# EAGLE board bottom (EAGLE 6.5.0)
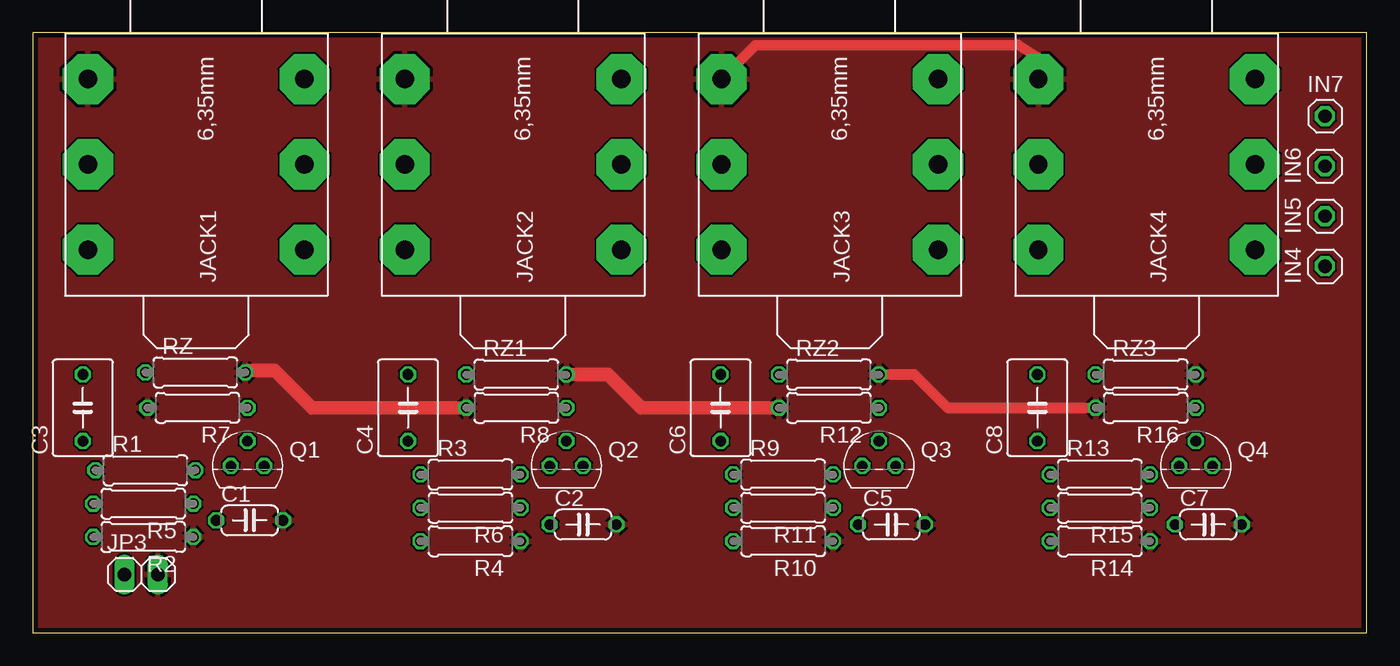
[diagram p0: board, top side]
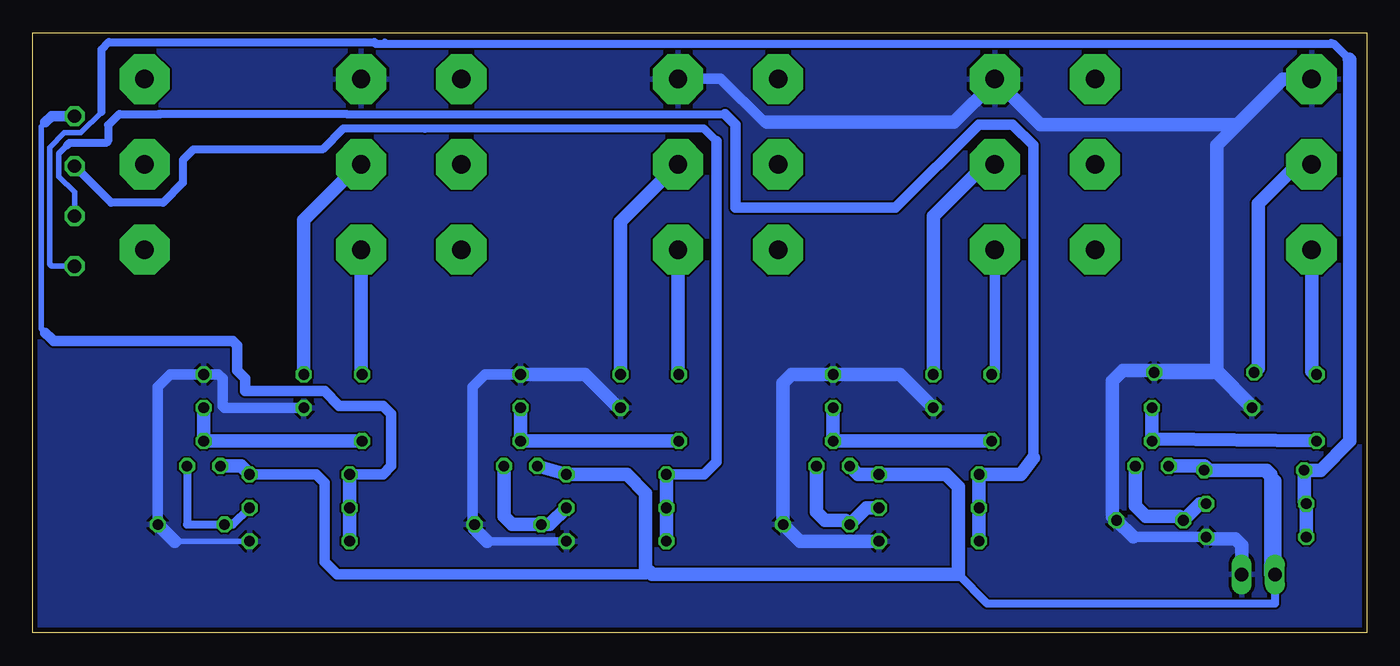
[diagram p1: board, bottom side, seen from below]

Size 101.6 x 45.72 mm. Coordinates in mm from the lower left corner, seen from the top.
Outline: 0,0 101.6,0 101.6,45.72 0,45.72 0,0
Copper layers (1*16): Top 0.0356mm / dielectric 1.5011mm / Bottom 0.0356mm
Design rules "OSHpark": minimum track width 6mil, minimum drill 13mil, track to track 6mil, track to pad 6mil, pad to pad 6mil, via to via 6mil, smd to smd 6mil, copper to edge 15mil, drill to drill 6mil, minimum pad ring 7mil, minimum via ring 7mil, stop-mask expansion 3mil, vias tented up to drill 0mil, thermal gap 10mil

## Footprints (pad centres in the part's own frame; a part is rotated, then mirrored left to right if it is on the bottom)
C050-024X044 = drill 0.813 octagon: 1 -2.54,0; 2 2.54,0
C050-045X075 = drill 0.813 octagon: 1 -2.54,0; 2 2.54,0
1X01 = drill 1.016 octagon: 1 0,0
JACK_STEREO_6.35MM = drill 1.4 pad 3.81 octagon: 2 -6,-8.5; 3 -6,8; 4 0.5,-8.5; 5 0.5,8; 6 7,-8.5; 7 7,8
1X02 = drill 1.016 long: 1 -1.27,0; 2 1.27,0
TO92 = drill 0.813 octagon: 1 1.27,0; 2 0,1.905; 3 -1.27,0
0207/7 = drill 0.813 octagon: 1 -3.81,0; 2 3.81,0

## Placement (x,y rotation side)
C1  82pf  [C050-024X044]  16.51,8.57 0 top
C2  82pf  [C050-024X044]  41.91,8.26 0 top
C3  1uF  [C050-045X075]  3.81,17.15 90 top
C4  1uF  [C050-045X075]  28.57,17.15 90 top
C5  82pf  [C050-024X044]  65.41,8.26 0 top
C6  1uF  [C050-045X075]  52.39,17.15 90 top
C7  82pf  [C050-024X044]  89.53,8.26 0 top
C8  1uF  [C050-045X075]  76.52,17.15 90 top
IN4  [1X01]  98.42,27.94 90 top
IN5  [1X01]  98.42,31.75 90 top
IN6  [1X01]  98.42,35.56 90 top
IN7  [1X01]  98.42,39.37 0 top
JACK1  JACK_STEREO_6.35MM  [JACK_STEREO_6.35MM]  12.7,36.2 270 top
JACK2  JACK_STEREO_6.35MM  [JACK_STEREO_6.35MM]  36.83,36.2 270 top
JACK3  JACK_STEREO_6.35MM  [JACK_STEREO_6.35MM]  60.96,36.2 270 top
JACK4  JACK_STEREO_6.35MM  [JACK_STEREO_6.35MM]  85.09,36.2 270 top
JP3  9v  [1X02]  8.26,4.45 0 top
Q1  J201  [TO92]  16.35,12.7 0 top
Q2  J201  [TO92]  40.64,12.7 0 top
Q3  J201  [TO92]  64.45,12.7 0 top
Q4  J201  [TO92]  88.58,12.7 0 top
R1  2m2  [0207/7]  8.57,12.38 0 top
R2  2m2  [0207/7]  8.41,7.3 180 top
R3  2m2  [0207/7]  33.34,12.07 0 top
R4  2m2  [0207/7]  33.34,6.98 180 top
R5  10k  [0207/7]  8.41,9.84 180 top
R6  10k  [0207/7]  33.34,9.53 180 top
R7  3k  [0207/7]  12.54,17.15 180 top
R8  3k  [0207/7]  36.83,17.15 180 top
R9  2m2  [0207/7]  57.15,12.07 0 top
R10  2m2  [0207/7]  57.15,6.98 180 top
R11  10k  [0207/7]  57.15,9.53 180 top
R12  3k  [0207/7]  60.64,17.15 180 top
R13  2m2  [0207/7]  81.28,12.07 0 top
R14  2m2  [0207/7]  81.28,6.98 180 top
R15  10k  [0207/7]  81.28,9.53 180 top
R16  3k  [0207/7]  84.77,17.15 180 top
RZ  560r  [0207/7]  12.38,19.84 0 top
RZ1  560r  [0207/7]  36.83,19.69 0 top
RZ2  560r  [0207/7]  60.64,19.69 0 top
RZ3  560r  [0207/7]  84.77,19.69 0 top

## Library data of the parts
C1-C8 R1-R16 RZ RZ1-RZ3 = rcl
IN4-IN7 JP3 = pinhead
JACK1-JACK4 = jack_6.35mm_mine
Q1-Q4 = transistor-fet

## Nets
GND: C1.2 C2.2 C5.2 C7.2 JACK1.2 JACK2.2 JACK3.2 JACK4.2 JP3.2 R2.1 R4.1 R7.2 R8.2 R10.1 R12.2 R14.1 R16.2 RZ1.2 RZ2.2 RZ3.2 RZ.2
INPUT1: IN4.1 R1.1 R2.2 R5.2
INPUT2: IN5.1 R3.1 R4.2 R6.2
INPUT3: IN6.1 R9.1 R10.2 R11.2
N$1: JACK4.4 RZ3.1
N$2: C1.1 Q1.1 R5.1
N$3: C3.1 Q1.2 R7.1
N$4: C5.1 Q3.1 R11.1
N$5: C3.2 JACK1.6
N$6: JACK1.4 RZ.1
N$7: C2.1 Q2.1 R6.1
N$8: C4.1 Q2.2 R8.1
N$10: C4.2 JACK2.6
N$11: JACK2.4 RZ1.1
N$12: C8.2 JACK4.6
N$13: C6.1 Q3.2 R12.1
N$14: C6.2 JACK3.6
N$15: JACK3.4 RZ2.1
N$16: C8.1 Q4.2 R16.1
N$17: C7.1 Q4.1 R15.1
N$18: IN7.1 R13.1 R14.2 R15.2
VCC: JP3.1 Q1.3 Q2.3 Q3.3 Q4.3 R1.2 R3.2 R9.2 R13.2

## Tracks (layer width: path | path; a pad name or v marks a point on that pad's centre or on a via)
GND
  Top 0.813: JACK3.2 55.03,44.77 74.61,44.77 75.05,44.81 76.5,43.85 JACK4.2 | R16.2 69.69,17.15 67.15,19.69 RZ2.2
  Top 1.016: R8.2 21.27,17.15 18.41,20 16.35,20 RZ.2 | R12.2 46.35,17.15 43.81,19.69 RZ1.2
  Bottom 0.406: R14.1 90.81,6.98
  Bottom 0.61: 66.99,6.98 R10.1 66.83,6.98 68.1,8.26
  Bottom 0.813: R2.1 17.78,7.3 | 45.67,38.89 45.88,38.89 49.21,42.23 52.43,42.23 JACK3.2 | 68.1,8.26 68.1,18.73 67.15,19.69 RZ2.2 | C7.2 92.08,18.73 91.12,19.69 RZ3.2 87.47,19.69 87.15,19.37 87.15,17.3 87,17.15 R16.2
  Bottom 1.016: JACK1.2 6.38,42.2 9.84,38.73 | 9.84,38.73 24.87,38.73 JACK2.2 28.33,42 31.43,38.89 45.67,38.89 | RZ.2 11.43,19.84 R7.2 8.73,17.3 11.43,20 | 17.78,7.3 C1.2 19.37,8.89 19.37,19.21 18.57,20 11.43,20 | JP3.2 9.53,6.67 10,7.14 12.06,7.14 R2.1 | 11.43,20 11.43,37.15 9.84,38.73 | R8.2 35.56,19.69 RZ1.2 43.81,19.69 44.45,19.05 C2.2 43.18,6.98 R4.1 | R12.2 56.99,17.15 59.53,19.69 RZ2.2 | C5.2 67.94,7.94 66.99,6.98 | 90.81,6.98 C7.2
  pour Bottom: 0,45.72 0,0 101.6,0 101.6,45.72
  pour Top: 0,45.72 0,0 101.6,0 101.6,45.72
INPUT1
  Bottom 0.406: IN4.1 100.17,27.94 100.33,28.1 100.33,36.99 99.22,38.1 97.95,38.1 96.36,39.69 | 74.81,45.09 74.61,44.89
  Bottom 0.61: 2.65,44.89 74.61,44.89 75.45,44.89 75.58,45.01 95.81,45.01 96.36,44.45 96.36,39.69 | 2.5,44.89 1.33,43.71 1.33,43.72 2.49,44.89 2.5,44.89 | 2.5,44.89 2.65,44.89 | 2.7,44.93 2.7,44.94 2.65,44.89
  Bottom 1.016: 1.33,43.71 1.27,43.66 1.27,14.61 3.49,12.38 R1.1 4.76,10 R5.2 R2.2
INPUT2
  Bottom 0.406: 98.98,37.15 99.62,36.51 99.62,34.77 98.42,33.58 IN5.1
  Bottom 0.61: 48.9,39.52 77.71,39.52 77.88,39.54 91.98,39.54 91.84,39.53 95.02,39.53 95.86,38.68 95.86,37.47 96.01,37.31 98.82,37.31 98.98,37.15
  Bottom 0.813: 48.9,39.52 48.08,38.71 48.08,32.39 35.88,32.39 29.53,38.73 26.99,38.73 25.4,37.15 25.4,13.34
  Bottom 1.016: 25.4,13.34 26.35,12.07 R3.1 R6.2 R4.2
INPUT3
  Bottom 0.61: IN6.1 95.65,32.78 91.68,32.78 90.17,34.29 90.17,36.04 89.38,36.83 79.53,36.83 77.95,38.42 71.75,38.42 71.75,38.38 71.72,38.42 50.48,38.42 49.53,37.47
  Bottom 0.813: 49.53,37.47 49.53,13.02 50.48,12.07 R9.1
  Bottom 1.016: R9.1 R11.2 R10.2
N$1
  Bottom 1.016: JACK4.4 76.7,35.7 80.96,31.43 RZ3.1
N$2
  Bottom 1.016: Q1.1 17.62,9.68 16.83,8.89 14.29,8.89 C1.1 12.7,9.84 R5.1
N$3
  Bottom 1.016: R7.1 Q1.2 16.19,14.76 C3.1
N$4
  Bottom 1.016: Q3.1 65.72,8.89 65.09,8.26 C5.1 62.23,8.26 R11.1
N$5
  Bottom 1.016: JACK1.6 4.2,19.92 C3.2
N$6
  Bottom 1.016: JACK1.4 5.26,35.7 8.26,32.7 8.26,20.16 RZ.1
N$7
  Bottom 1.016: Q2.1 41.91,9.21 41.27,8.57 39.69,8.57 C2.1 38.1,9.53 R6.1
N$8
  Bottom 1.016: R8.1 Q2.2 C4.1
N$10
  Bottom 0.813: JACK2.6 28.33,19.93 C4.2
N$11
  Bottom 1.016: RZ1.1 33.02,31.75 28.89,35.88 28.51,35.88 JACK2.4
N$12
  Bottom 1.016: JACK4.6 76.59,19.76 C8.2
N$13
  Bottom 1.016: R12.1 Q3.2 C6.1
N$14
  Bottom 1.016: JACK3.6 52.46,19.76 C6.2
N$15
  Bottom 1.016: RZ2.1 56.83,31.32 JACK3.4
N$16
  Bottom 1.016: R16.1 Q4.2 C8.1
N$17
  Bottom 0.61: Q4.1 89.85,8.26 C7.1 86.36,8.26 R15.1
N$18
  Bottom 0.406: 100.65,38.89 100.97,38.58 100.97,23.18 100.25,22.46
  Bottom 0.813: IN7.1 100.17,39.37 100.65,38.89 | 100.65,22.86 100.25,22.46 100.01,22.23 86.36,22.23 86.04,21.91 86.04,20 85.41,19.37 85.41,18.42 79.38,18.42 78.26,17.3 74.93,17.3 74.3,16.67 74.3,12.7 74.93,12.07 R13.1
  Bottom 1.016: R13.1 R15.2 R14.2
VCC
  Bottom 0.61: JP3.1 7.3,4.45 | 6.99,4.13 6.99,2.22 28.89,2.22 31.11,4.45
  Bottom 0.813: R13.2 80.01,12.07 79.38,11.43 79.38,5.4 78.42,4.45 54.93,4.45 54.53,4.52
  Bottom 1.016: 12.06,12.38 R1.2 12.7,12.7 Q1.3 12.38,12.7 12.06,12.38 | 12.06,12.38 7.78,12.38 | 7.78,12.38 6.99,11.59 6.99,5.08 6.83,4.92 6.83,4.45 JP3.1 | Q2.3 38.73,12.07 R3.2 32.07,12.07 31.11,11.11 31.11,4.45 54.45,4.45 54.53,4.52 54.93,4.92 54.93,10.64 56.36,12.07 R9.2 Q3.3 | 7.78,12.38 7.62,12.38 7.3,12.07 7.3,4.45 6.99,4.13 | Q4.3 85.72,12.7 R13.2